# Altium PCB LCD_Board.PcbDoc
Units mil, origin at the board's own origin, x right, y up, seen from the top; angles counter-clockwise.
Board outline 4860 x 2830 mil, 2 copper layers (Top Layer, Bottom Layer); 37 components, 28 nets, 226 pads, 30 vias.
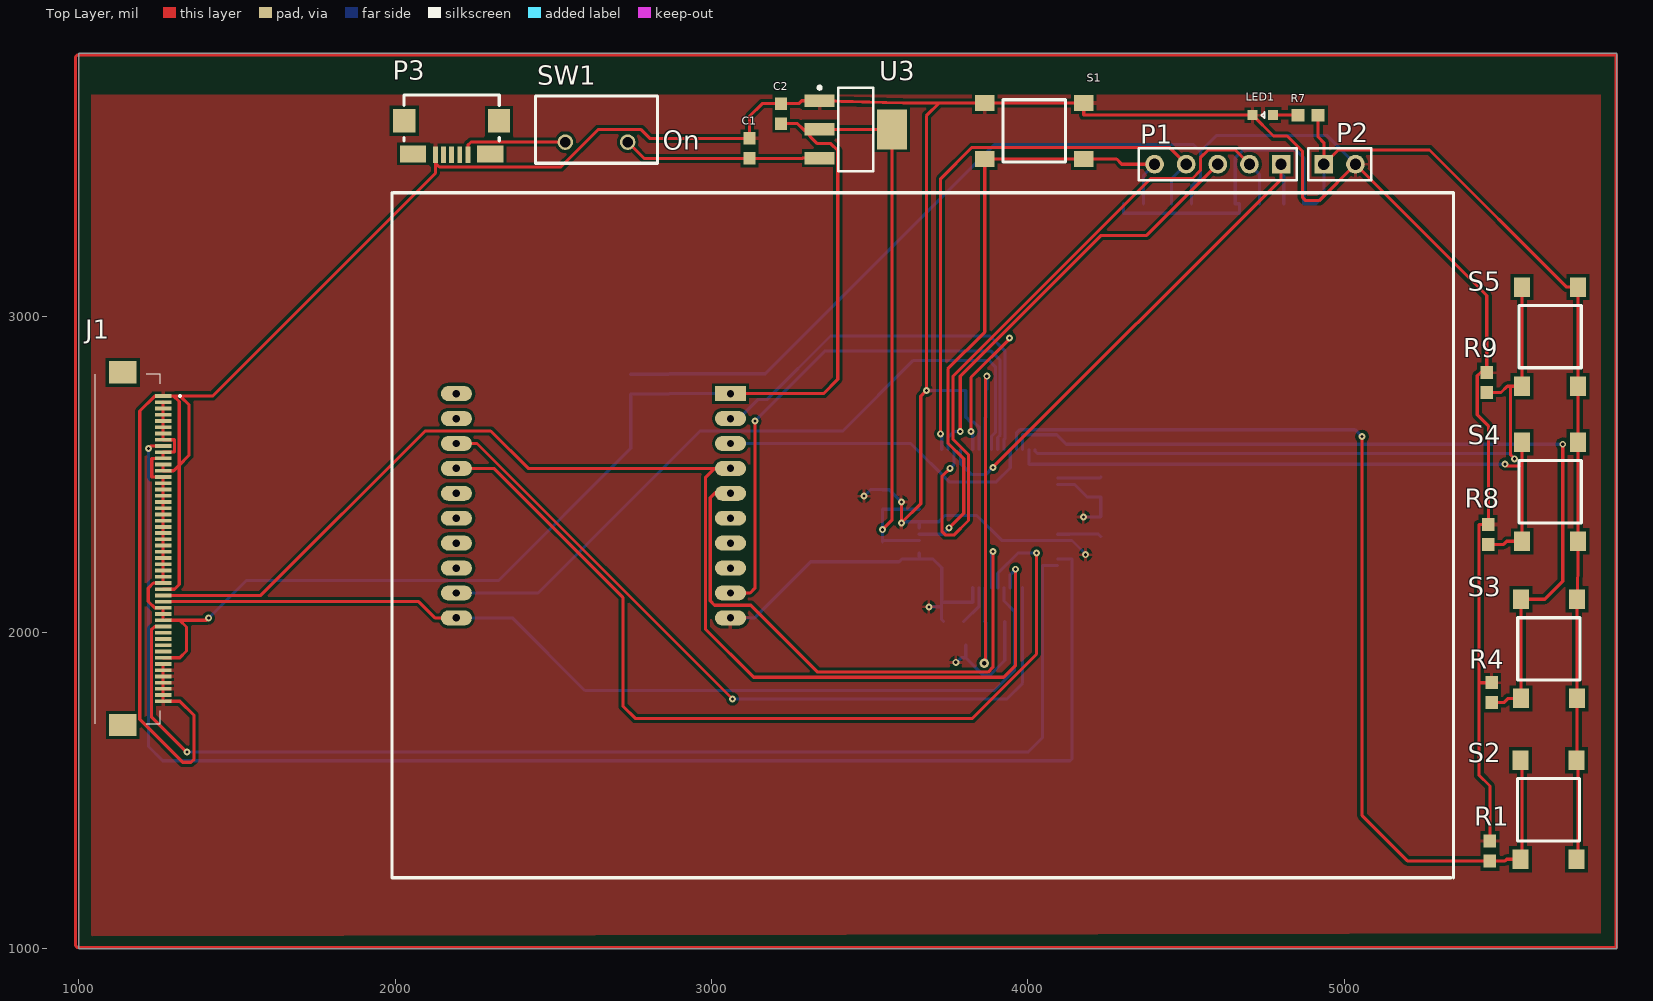
[diagram p0: Top Layer view]
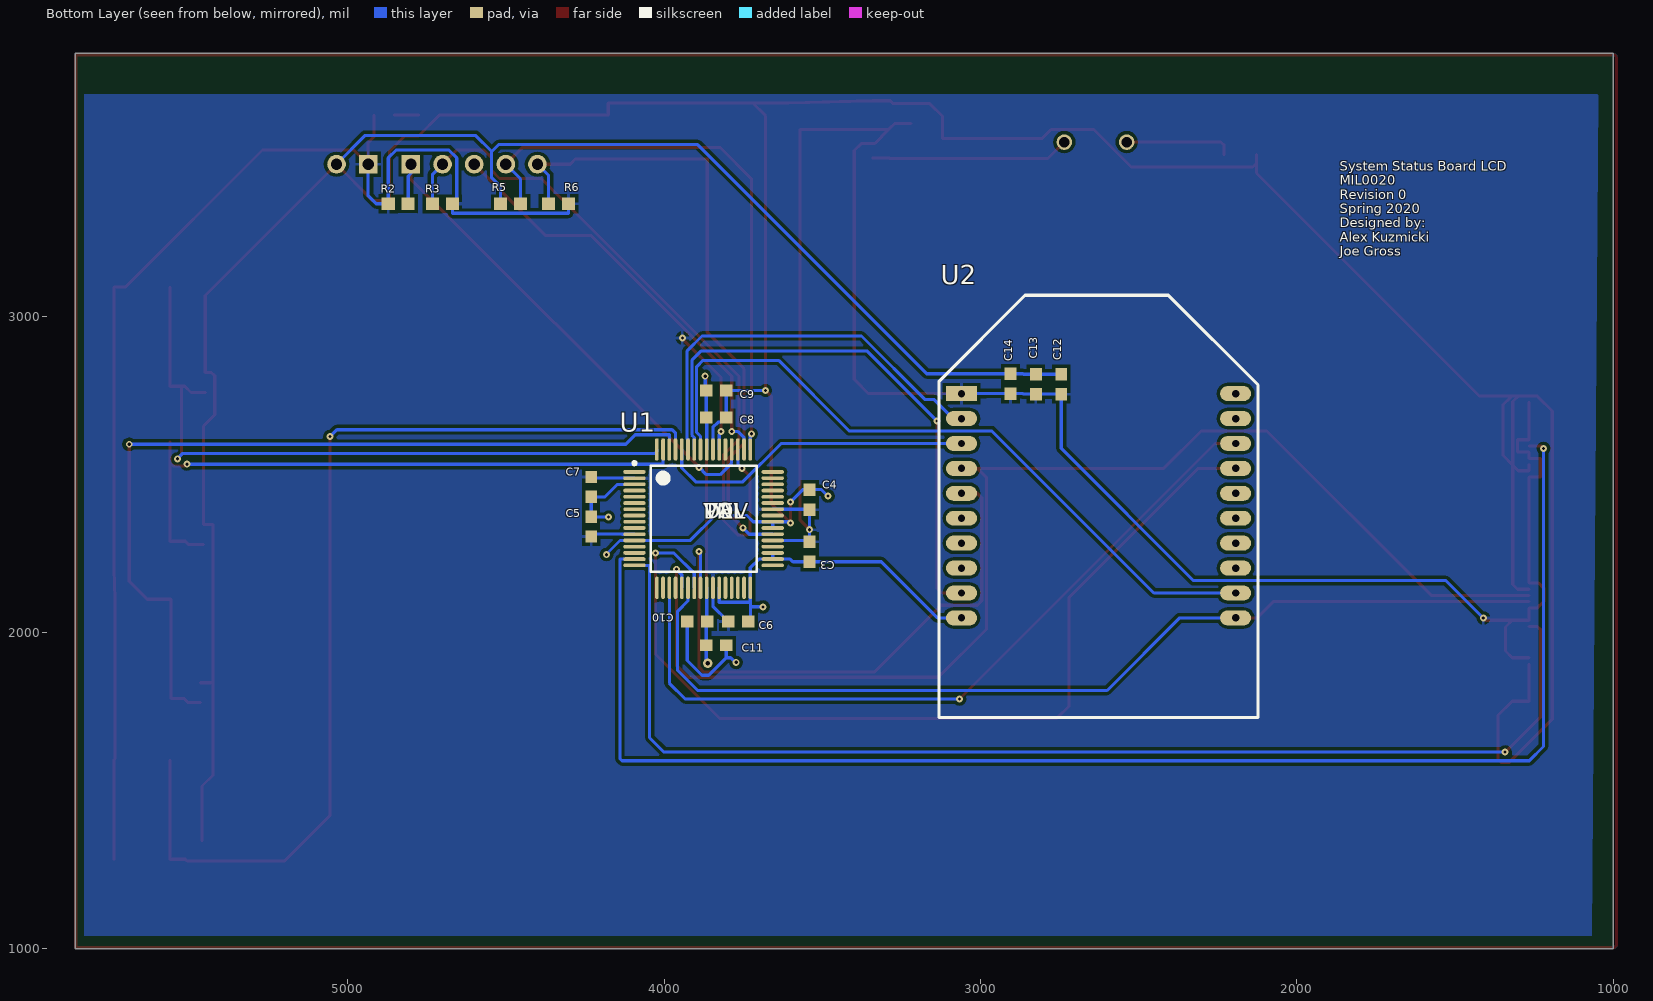
[diagram p1: Bottom Layer view, seen from below]

## Layer stack, top to bottom
Top Solder: solder mask 0.4, Solder Resist, Dk 3.5
Top Layer: signal copper 1.4
Dielectric 1: dielectric 12.6, FR-4, Dk 4.8
Bottom Layer: signal copper 1.4
Bottom Solder: solder mask 0.4, Solder Resist, Dk 3.5

## Board outline
1000,1000 5860,1000 5860,3830 1000,3830

## Design rules (kind name [scope] priority, off if disabled: settings)
Clearance [All] p1: gap=10 ignorepadtopadclearanceinfootprint=FALSE except(0: Arc-Hole Track-Hole SMDPad-Hole THPad-Hole Via-Hole Fill-Hole Poly-Hole Region-Hole Text-Hole; 5: Track-Track Track-SMDPad SMDPad-SMDPad; 7: Track-Via)
HoleSize [All] p1: absolutevalues=TRUE maxlimit=150 minlimit=10 maxpercent=80.000 minpercent=20.000
MinimumAnnularRing [All] p1: minimumring=7
MinimumSolderMaskSliver [All] p1: minsoldermaskwidth=1
PolygonConnect [All] p1: connectstyle=Relief reliefconductorwidth=10 reliefentries=4 polygonreliefangle="90 Angle" airgapwidth=10
RoutingVias [All] p1: holewidth=10 width=22 viastyle="Through Hole" minholewidth=10 minwidth=22 maxholewidth=100 maxwidth=150
SilkToSolderMaskClearance [IsPad] p1: minsilkscreentomaskgap=5 clearancetoexposedcopper=TRUE
SolderMaskExpansion [All] p1: expansion=4
Width [All] p1: maxlimit=150 minlimit=8 preferedwidth=10
27 further rules are at their usual default settings.

## Components (designator, comment, footprint, x,y, rotation, side; value= is the part's Value field where it differs from the comment)
C1 "Cap" CAPC0603 3120,3530 r90 top value=1uF
C2 "Cap" CAPC0603 3220,3640 r90 top value=1uF
C3 "Cap" CAPC0603 3540,2255 r270 bottom value=0.1uF
C4 "Cap" CAPC0603 3540,2420 r90 bottom value=0.1uF
C5 "Cap" CAPC0603 4230,2335 r90 bottom value=0.1uF
C6 "Cap" CAPC0603 3765,2035 r180 bottom value=0.1uF
C7 "Cap" CAPC0603 4230,2460 r270 bottom value=2.1uF
C8 "Cap" CAPC0603 3835,2680 r180 bottom value=0.1uF
C9 "Cap" CAPC0603 3835,2765 r180 bottom value=0.1uF
C10 "Cap" CAPC0603 3895,2035 r0 bottom value=1.0uF
C11 "Cap" CAPC0603 3835,1960 r180 bottom value=2.2uF
C12 "Cap" CAPC0603 2745,2785 r90 bottom value=10uF
C13 "Cap" CAPC0603 2825,2785 r90 bottom value=1uF
C14 "Cap" CAPC0603 2905,2786.5 r90 bottom value=47pF
J1 "XF3M-5015-1B" XF3M50151B 1155,2265 r270 top
LED1 "LED" LED0603 4742.48,3635 r180 top
P1 "Header 5" HDR1X5 4800,3480 r180 top
P2 "Header 2" HDR1X2 4935,3480 r0 top
P3 "USB Micro" 10118192-0001LF 2178.82,3489 r180 top
R1 "Res" RES0603 5460,1310 r270 top value=10k
R2 "Res" RES0603 4840,3355 r180 bottom value=10k
R3 "Res" RES0603 4700,3355 r0 bottom value=10k
R4 "Res" RES0603 5465,1810 r270 top value=10k
R5 "Res" RES0603 4485,3355 r0 bottom value=10k
R6 "Res" RES0603 4333.5,3355 r0 bottom value=10k
R7 "Res" RES0603 4885,3635 r180 top value=10k
R8 "Res" RES0603 5455,2310 r270 top value=10k
R9 "Res" RES0603 5450,2790 r270 top value=10k
S1 "Button" PTS645xxxxSMTR92 4020,3585 r180 top
S2 "Button" PTS645xxxxSMTR92 5645,1440 r90 top
S3 "Button" PTS645xxxxSMTR92 5646.42,1948.5 r90 top
S4 "Button" PTS645xxxxSMTR92 5650,2445 r90 top
S5 "Button" PTS645xxxxSMTR92 5650,2935 r90 top
SW1 "360-2610-ND" AS11CP 50392.48,52455.51 r0 top
U1 "TM4C123GH6PMT7R" PM0064A_N 3875,2360 r180 bottom value=Value
U2 "XBee" XBee 3060,2754.92 r180 bottom
U3 "TLV1117LV33DCYR" SOT23-4N 3455.83,3590 r0 top

## Footprints (in the part's own frame and the unit in brackets; to place one, negate y for a bottom-side part, rotate by r counter-clockwise, add the part's x,y. Pads: shape width x height; smd on the part's side, far side on the other; paste and mask are expansions set on the pad)
10118192-0001LF [mm] "USB Micro-B Recepticle"
  rect 0.4x1.35 smd: 1(-1.3,-0.533) 2(-0.65,-0.533) 3(0,-0.533) 4(0.65,-0.533) 5(1.3,-0.533)
  rect 1.8x1.9 smd: SHD(-3.8,-3.248) SHD(3.8,-3.248)
  rect 2.1x1.35 smd: SHD(-3.1,-0.584) SHD(3.1,-0.598)
  silkscreen extent -3.83,-5.33 3.83,-1.63, body extent -3.96,-5.98 3.96,-0.32, height 3.09
AS11CP [mm] "SPST Slide Switch"
  round 1.25 hole 0.85: In(-1215.5,-1242.2) Out(-1210.5,-1242.2)
  silkscreen extent -1217.9,-1243.9 -1208.1,-1238.5, body extent -1218,-1243.8 -1208.2,-1238.42, height 12.9
CAPC0603 [mm] "Chip Capacitor, 2-Leads, Body 1.60x0.80mm, IPC Medium Density"
  rect 1x0.95 smd: 1(-0.8,0) 2(0.8,0)
  body extent -0.88,-0.48 0.87,0.48, height 0.8
HDR1X2 [mm] "Connector; Header; 2 Position"
  rect 1.5x1.5 hole 0.9: 1(0,0)
  round 1.5 hole 0.9: 2(2.54,0)
  silkscreen extent -1.27,-1.27 3.81,1.27
HDR1X5 [mm] "Connector; Header; 5 Position"
  rect 1.5x1.5 hole 0.9: 1(0,0)
  round 1.5 hole 0.9: 2(2.54,0) 3(5.08,0) 4(7.62,0) 5(10.16,0)
  silkscreen extent -1.27,-1.27 11.43,1.27
LED0603 [mm] "Chip LED, 2-Leads, Body 1.60x0.80mm, IPC Medium Density"
  rect 0.8x0.8 smd: A(-0.825,0) C(0.825,0)
  silkscreen extent -0.13,-0.25 0.12,0.25, body extent -0.88,-0.48 0.87,0.47, height 0.8
PM0064A_N [mm]
  oval 1.8x0.3 smd paste-0.102 mask+0.051: 1(-5.55,3.75) 2(-5.55,3.25) 3(-5.55,2.75) 4(-5.55,2.25) 5(-5.55,1.75) 6(-5.55,1.25) 7(-5.55,0.75) 8(-5.55,0.25) 9(-5.55,-0.25) 10(-5.55,-0.75) 11(-5.55,-1.25) 12(-5.55,-1.75) 13(-5.55,-2.25) 14(-5.55,-2.75) 15(-5.55,-3.25) 16(-5.55,-3.75) 33(5.55,-3.75) 34(5.55,-3.25) 35(5.55,-2.75) 36(5.55,-2.25) 37(5.55,-1.75) 38(5.55,-1.25) 39(5.55,-0.75) 40(5.55,-0.25) 41(5.55,0.25) 42(5.55,0.75) 43(5.55,1.25) 44(5.55,1.75) 45(5.55,2.25) 46(5.55,2.75) 47(5.55,3.25) 48(5.55,3.75)
  oval 0.3x1.8 smd paste-0.102 mask+0.051: 17(-3.75,-5.55) 18(-3.25,-5.55) 19(-2.75,-5.55) 20(-2.25,-5.55) 21(-1.75,-5.55) 22(-1.25,-5.55) 23(-0.75,-5.55) 24(-0.25,-5.55) 25(0.25,-5.55) 26(0.75,-5.55) 27(1.25,-5.55) 28(1.75,-5.55) 29(2.25,-5.55) 30(2.75,-5.55) 31(3.25,-5.55) 32(3.75,-5.55) 49(3.75,5.55) 50(3.25,5.55) 51(2.75,5.55) 52(2.25,5.55) 53(1.75,5.55) 54(1.25,5.55) 55(0.75,5.55) 56(0.25,5.55) 57(-0.25,5.55) 58(-0.75,5.55) 59(-1.25,5.55) 60(-1.75,5.55) 61(-2.25,5.55) 62(-2.75,5.55) 63(-3.25,5.55) 64(-3.75,5.55)
  silkscreen extent -5.68,-4.25 4.25,4.57, body extent -4.19,-4.19 4.19,4.19, height 0.64
PTS645xxxxSMTR92 [mm] "PTS645 Series SMT 6 mm Tactile Switch"
  rect 1.555x1.3 smd: A(-3.975,2.25) A(3.975,2.25) B(-3.975,-2.25) B(3.975,-2.25)
  silkscreen extent -2.5,-2.5 2.5,2.5, body extent -3,-3 3,3, height 4.5
RES0603 [mm] "Chip Resistor, 2-Leads, Body 1.60x0.80mm, IPC Medium Density"
  rect 1.05x1 smd: 1(-0.8,0) 2(0.8,0)
  body extent -0.88,-0.48 0.87,0.47, height 0.8
SOT23-4N [mm] "SOT223, 4-Leads, Body 6.50x7.00mm (avg), Pitch 2.30mm, IPC Medium Density"
  rect 2.4x1 smd: 1(-2.9,2.3) 2(-2.9,0) 3(-2.9,-2.3)
  rect 2.4x3.2 smd: 4(2.9,0)
  silkscreen extent -3.02,-3.35 1.4,3.47, body extent -1.85,-3.35 1.85,3.35, height 1.7
XBee [mm]
  rect 2.5x1.2 hole 0.6: 1(0,0)
  oval 2.5x1.2 hole 0.6: 2(0,-2) 3(0,-4) 4(0,-6) 5(0,-8) 6(0,-10) 7(0,-12) 8(0,-14) 9(0,-16) 10(0,-18) 11(22,-18) 12(22,-16) 13(22,-14) 14(22,-12) 15(22,-10) 16(22,-8) 17(22,-6) 18(22,-4) 19(22,-2) 20(22,0)
  silkscreen extent -1.8,-26 23.8,7.9, body extent -1.9,-26 23.8,8, height 4.06
XF3M50151B [mm]
  rect 0.3x1.3 smd: 1(-12.25,2.85) 2(-11.75,2.85) 3(-11.25,2.85) 4(-10.75,2.85) 5(-10.25,2.85) 6(-9.75,2.85) 7(-9.25,2.85) 8(-8.75,2.85) 9(-8.25,2.85) 10(-7.75,2.85) 11(-7.25,2.85) 12(-6.75,2.85) 13(-6.25,2.85) 14(-5.75,2.85) 15(-5.25,2.85) 16(-4.75,2.85) 17(-4.25,2.85) 18(-3.75,2.85) 19(-3.25,2.85) 20(-2.75,2.85) 21(-2.25,2.85) 22(-1.75,2.85) 23(-1.25,2.85) 24(-0.75,2.85) 25(-0.25,2.85) 26(0.25,2.85) 27(0.75,2.85) 28(1.25,2.85) 29(1.75,2.85) 30(2.25,2.85) 31(2.75,2.85) 32(3.25,2.85) 33(3.75,2.85) 34(4.25,2.85) 35(4.75,2.85) 36(5.25,2.85) 37(5.75,2.85) 38(6.25,2.85) 39(6.75,2.85) 40(7.25,2.85) 41(7.75,2.85) 42(8.25,2.85) 43(8.75,2.85) 44(9.25,2.85) 45(9.75,2.85) 46(10.25,2.85) 47(10.75,2.85) 48(11.25,2.85) 49(11.75,2.85) 50(12.25,2.85)
  rect 1.8x2.2 smd: MP1(-14.15,-0.4) MP2(14.15,-0.4)
  silkscreen extent -14.05,-2.6 14.05,4.25, body extent -14.87,-2.6 14.87,3.47, height 3.23

## Part data
C1 C2: Manufacturer Part Number=C0603C105K8PACTU, Supplier Part Number 1=399-3118-1-ND, Supplier 1=Digi-Key
C3 C4 C5 C6 C7 C8 C9 C10 C11 C12 C13 C14: Supplier Part Number 1=1276-1000-1-ND, Supplier 1=Digi-Key
J1: "Connector", Manufacturer_Name="Omron Electronics", Mouser2 Part Number=653-XF3M-5015-1B, Datasheet Link=https://componentsearchengine.com/Datasheets/1/XF3M-5015-1B.pdf, Height=3.13mm, Manufacturer_Part_Number=XF3M-5015-1B, Mouser2 Price/Stock=https://www.mouser.com/Search/Refine.aspx?Keyword=653-XF3M-5015-1B
LED1: Color=Red, Supplier Part Number 1=754-1122-1-ND, Supplier 1=Digi-Key
P1: "Header, 5-Pin", LatestRevisionDate=17-Jul-2002, LatestRevisionNote="Re-released for DXP Platform.", Publisher="Altium Limited"
P2: "Header, 2-Pin", LatestRevisionDate=17-Jul-2002, LatestRevisionNote="Re-released for DXP Platform.", Publisher="Altium Limited"
P3: "USB Mini B Metal Shield SMT", Supplier Part Number 1=609-4613-1-ND, Supplier 1=Digi-Key
R1 R2 R3 R4 R5 R6 R7 R8 R9: Supplier Part Number 1=RMCF0603JT10K0CT-ND, Supplier 1=Digi-Key
S1 S2 S3 S4 S5: "SPST Button", Supplier Part Number 1=CKN9087CT-ND, Supplier 1=Digi-Key
SW1: library part "SPST Slide Switch", "SPST Slide Switch", Supplier 1=Digi-Key, Supplier Part Number 1=360-2610-ND
U1: "Imported", Alternate_PartNumber=TM4C123GH6PMT, Manufacturer="Texas Instruments", PartNumber=TM4C123GH6PMTR, CompType=IC, MountType=SMT, PackageReference=PM0064A, PIN_COUNT=64, RefDes=RefDes, RoHS=Y, TYPE=TYPE
U2: "XBee radio", Supplier Part Number 1=602-1181-ND, Supplier 1=Digi-Key
U3: "IC REG LINEAR 3.3V 1A SOT223-4", Digi-Key Part Number=296-28778-1-ND

## Via types
v1: diameter 22, hole 10, Top Layer to Bottom Layer, 29 vias
v2: diameter 30, hole 15, Top Layer to Bottom Layer, tented both sides, 1 vias

## Nets (pads, with @x,y where several pads share a name; then routed paths per layer and width w, separated by ;. In a path a pad name is that pad's centre, name@x,y a point inside that pad or via, vN(x,y) a via of type N, cw(c..) or ccw(c..) an arc to the next point about the centre after c; other vN are vias at no path point)
Button_0: R1.2 S2.A U1.61 | length 3234.8
  Top Layer w10: v1(5056,2619) 5056,1421.5 5199,1278.5 R1.2 5508,1278.5 5513,1283.5 5561.42,1283.5 S2.A@5561.42,1596.5
  Bottom Layer w10: U1.61 3963.58,2630 3974.58,2641 5034,2641 v1(5056,2619)
Button_1: R4.2 S3.A U1.62 | length 2765.9
  Top Layer w10: R4.2 5504,1778.5 5517.5,1792.01 5557.83,1792.01 5557.83,2105 5633,2105 5690,2162 v1(5690,2595)
  Bottom Layer w10: U1.62 3983.27,2625 4091,2625 4121,2595 v1(5690,2595)
Button_2: R8.2 S4.A U1.63 | length 2035.7
  Top Layer w10: R8.2 5503,2278.5 5513,2288.5 5561.42,2288.5 5561.42,2537.42 ; v1(5508,2532) 5514,2526 5550,2526 5561.42,2537.42 ; S4.A@5561.42,2601.5 5561.42,2537.42
  Bottom Layer w10: U1.63 4002.95,2532 v1(5508,2532)
Button_3: R9.2 S5.A U1.64 | length 2199
  Top Layer w10: R9.2 5495,2758.5 5515,2778.5 5525,2778.5 ; v1(5538,2549) 5525,2562 5525,2778.5 ; S5.A@5561.42,3091.5 5561.42,2778.5 5525,2778.5
  Bottom Layer w10: U1.64 4022.64,2572 4028.64,2566 5521,2566 v1(5538,2549)
Button_4: U1.43
Button_5: U1.44
CTS(L): U1.57 U2.12 | length 2282.4
  Bottom Layer w10: U2.12 2452,2125 2964,2637 3415,2637 3638,2860 3877,2860 3897,2840 3897,2632 3884.84,2619.84 U1.57
GND: C1.2 C2.2 C3.2 C4.2 C5.2 C6.2 C7.2 C8.2 C9.2 C10.2 C11.2 C12.2 C13.2 C14.2 J1.1 J1.12 J1.13 J1.32 J1.44 J1.45 J1.46 J1.47 J1.48 J1.49 J1.50 LED1.C P2.2 P3.5 R1.1 R4.1 R5.2 R8.1 R9.1 S1.B U1.3 U1.12 U1.27 U1.32 U1.34 U1.35 U1.39 U1.40 U1.55 U2.10 U3.1 | length 16835.5
  Top Layer w10: J1.44 J1.45 J1.46 J1.47 J1.48 J1.49 J1.50 1320,1782.72 1365,1737.72 1365,1600 1355,1590 1329,1590 1193,1726 1193,2700.28 1240,2747.28 J1.1 1300.51,2747.28 ; J1.32 1303,2137.05 1317.8,2151.84 1317.8,2528.8 ; J1.12 J1.13 1300.06,2511.06 1317.8,2528.8 ; P3.5 2127.64,3483.36 ; v1(3600,2413) v1(3600,2346) 3661,2407 3661,2747 v1(3679,2765) 3679,3632.58 3720,3673.58 ; R1.1 5460,1515 5425,1550 5425,1841.5 ; R4.1 5425,1841.5 ; 1300.51,2747.28 1321.72,2747.28 ; 1300.51,2747.28 1317.8,2730 1317.8,2528.8 ; 1317.8,2528.8 1349,2560 1349,2720 1321.72,2747.28 ; 1321.72,2747.28 1422.92,2747.28 2127.64,3452 2127.64,3483.36 ; 2127.64,3483.36 2140,3471 2524,3471 2643,3590 2776,3590 2804.5,3561.5 C1.2 3120,3631.5 3160,3671.5 C2.2 3276,3671.5 3285.06,3680.55 U3.1 3605.97,3673.58 3720,3673.58 ; 3720,3673.58 3863.5,3673.58 4176.5,3673.58 4176.5,3635 LED1.C 4776,3569 4819,3569 4868,3520 4868,3374.46 4877.46,3365 4920,3365 P2.2 5450,3065 R9.1 5430,2821.5 5420,2811.5 5420,2688 5455,2653 R8.1 5425,2341.5 5425,1841.5
  Bottom Layer w10: C12.2 C13.2 2864,2816.5 2865.5,2817.99 C14.2 3169.99,2817.99 3894,3542 4523,3542 4545,3520 ; U2.10 3136.26,2046.26 3313.5,2223.5 C3.2 3593,2223.5 3601.54,2232.05 U1.34 ; v1(3482,2431) 3503,2452 3540,2452 C4.2 3561.5,2451.5 v1(3600,2413) ; v1(3600,2346) 3604.16,2350.16 U1.40 ; U1.35 U1.34 ; U1.39 U1.40 ; v1(3679,2765) C9.2 C8.2 3804.49,2680 3819.49,2665 3828.97,2665 3845.47,2648.5 U1.55 ; v1(3687,2081) 3687.64,2081.64 3726.64,2081.64 ; C6.2 3726.64,2041.87 3726.64,2081.64 ; v1(3772,1906) 3775.25,1906 3789.74,1920.5 3803.5,1920.5 ; C11.2 3803.5,1920.5 ; U1.27 3825.79,2096 3727.36,2096 ; C10.2 3926.5,1911.5 3880,1865 3859,1865 3803.5,1920.5 ; U1.3 4147,2468.27 4186.76,2428.5 C7.2 C5.2 4228.5,2365 v1(4175,2365) ; v1@4185,2245 4139.24,2290.76 4093.85,2290.76 U1.12 3917.36,2291.1 3838.46,2370 3737.84,2370 3718,2350.16 U1.40 ; R5.2 4516.5,3408.5 4545,3437 4545,3520 ; P2.2 4944,3571 4596,3571 4545,3520 ; U1.34 3700,2232.05 3727.36,2204.69 U1.32 3727.36,2096 ; 3726.64,2081.64 3726.64,2095.28 3727.36,2096
  other v1: 4182,2246
"LCD CS": J1.38 U1.16 | length 3789.6
  Top Layer w10: J1.38 1240,2018.94 1230,2008.94 1230,1734 v1(1342,1622)
  Bottom Layer w10: v1(1342,1622) 4000,1622 4046,1668 4046,2212.36 U1.16
"LCD Reset": J1.9 U1.15 | length 4607.1
  Top Layer w10: v1(1221,2582) 1228.8,2589.8 J1.9
  Bottom Layer w10: v1(1221,2582) 1221,1640 1266,1595 4133,1595 4139,1601 4139,2232.05 U1.15
NetLED1_A: LED1.A R7.2 | length 78.5
  Top Layer w10: LED1.A R7.2
NetP3_1: P3.1 SW1.In | length 342.3
  Top Layer w10: P3.1 2230,3540 2240,3550 SW1.In
RST_N: P1.5 R6.2 S1.A U1.38 | length 2039
  Top Layer w10: v1(3750.95,2331) 3797,2377.05 3797,2549.21 3747.05,2599.16 3747.05,2833.05 3863.5,2949.5 3863.5,3496.42 4176.5,3496.42 4280,3496.42 4296.42,3480 P1.5
  Bottom Layer w10: U1.38 3730.74,2310.79 v1(3750.95,2331) ; R6.2 4365,3445 P1.5
Sleep: U1.58 U2.9 | length 1775.2
  Top Layer w10: U2.9 3122,2125 3137,2140 v1(3137,2667.98)
  Bottom Layer w10: v1(3137,2667.98) 3359.02,2890 3882,2890 3912,2860 3912,2624 3904.53,2616.53 U1.58
"SPI CLK": U1.19 U2.18 | length 2445.9
  Top Layer w10: U2.18 2259,2597.44 v1(3066.44,1790)
  Bottom Layer w10: v1(3066.44,1790) 3933,1790 3983.27,1840.27 U1.19
"SPI MISO": J1.33 U1.21 U2.4 | length 4004.5
  Top Layer w10: J1.33 1575.36,2117.36 2095,2637 2302,2637 2420.3,2518.7 3010,2518.7 ; U2.4 3010,2518.7 ; v1(3961,2200) 3961,1896.88 3922.9,1858.78 3133.22,1858.78 2980.79,2011.21 2980.79,2489.49 3010,2518.7
  Bottom Layer w10: U1.21 3943.9,2182.9 v1(3961,2200)
"SPI MOSI": J1.34 U1.22 U2.11 | length 3107.2
  Top Layer w10: J1.34 2074.58,2097.68 2126,2046.26 U2.11
  Bottom Layer w10: U2.11 2370.74,2046.26 2600,1817 3894,1817 3957,1880 3957,2067.21 3924.21,2100 U1.22
"SPI SS": U1.23 U2.17 | length 2959.6
  Top Layer w10: U2.17 2312.3,2518.7 2720,2111 2720,1768 2760,1728 3823,1728 4027,1932 v1(4027,2251)
  Bottom Layer w10: U1.23 3904.53,2187 3968.53,2251 v1(4027,2251)
TCK/SWCLK: P1.1 R2.2 U1.52 | length 1634
  Top Layer w10: v1(3889,2522) 4800,3433 P1.1
  Bottom Layer w10: U1.52 3786.42,2535.58 3822.93,2499.07 3866.07,2499.07 v1(3889,2522) ; P1.1 4800,3450.47 4808.5,3441.97 R2.2
TDI: P1.3 U1.50 | length 1350.9
  Top Layer w10: v1(3786,2635) 3786,2810 4231,3255 4375,3255 P1.3
  Bottom Layer w10: U1.50 3747.05,2616.05 3766,2635 v1(3786,2635)
TDO/SWO: P1.4 R5.1 U1.49 | length 1840.1
  Top Layer w10: v1(3724,2628) 3724,3434 3823,3533 4447,3533 P1.4
  Bottom Layer w10: v1(3724,2628) 3727.36,2624.64 U1.49 ; R5.1 4453.5,3433.5 P1.4
TMS/SWDIO: P1.2 R3.2 U1.51 | length 2272.2
  Top Layer w10: v1(3754,2519) 3727.95,2492.95 3727.95,2320 3739.95,2308 3766,2308 3812,2354 3812,2562 3763,2611 3763,2810 4388,3435 4520,3435 4545,3460 4545,3500 4570,3525 4655,3525 P1.2
  Bottom Layer w10: v1(3754,2519) 3766.73,2531.73 U1.51 ; P1.2 4731.5,3448.5 R3.2
"UART5 RX": U1.59 U2.2 | length 1308.8
  Bottom Layer w10: U2.2 3086,2676.18 3145.82,2736 3175,2736 3376,2937 3880,2937 3927,2890 3927,2612 3924.21,2612 U1.59
"UART5 TX": U1.60 U2.3 | length 1011
  Bottom Layer w10: U2.3 3629.56,2597.44 3751,2476 3900,2476 3943.9,2519.9 U1.60
VDD: C2.1 C3.1 C4.1 C5.1 C6.1 C7.1 C12.1 C13.1 C14.1 J1.2 J1.3 J1.4 J1.5 J1.6 J1.7 J1.8 J1.10 J1.11 J1.14 J1.15 J1.16 J1.17 J1.18 J1.19 J1.20 J1.21 J1.22 J1.23 J1.24 J1.25 J1.26 J1.27 J1.28 J1.29 J1.30 J1.31 J1.35 J1.36 J1.37 J1.43 P2.1 R2.1 R3.1 R6.1 R7.1 S2.B S3.B S4.B S5.B U1.2 U1.11 U1.26 U1.37 U1.42 U1.54 U2.1 U3.2 U3.4 | length 11400.9
  Top Layer w10: J1.43 1320,1920.51 1341,1941.51 1341,2017.62 1320,2038.62 ; J1.2 J1.3 J1.4 J1.5 J1.6 J1.7 J1.8 1302.8,2609.49 1302.8,2570.12 J1.10 J1.11 1231,2550.43 1231,2491.38 J1.14 J1.15 J1.16 J1.17 J1.18 J1.19 J1.20 J1.21 J1.22 J1.23 J1.24 J1.25 J1.26 J1.27 J1.28 J1.29 J1.30 J1.31 1236.24,2156.73 1220,2140.5 1220,2097.99 1240,2077.99 J1.35 J1.36 J1.37 1320,2038.62 ; v1(1411,2046) 1403.62,2038.62 1320,2038.62 ; U2.1 3353.92,2754.92 3399,2800 3399,3523.17 3377.17,3545 3334.5,3545 3289.5,3590 ; C2.1 3271,3608.5 3289.5,3590 ; v1(3540,2325) 3570,2355 U3.4 U3.2 3289.5,3590 ; v1(3820,2635) 3820,2806.21 3943.79,2930 v1@3945,2930 ; R7.1 4916.5,3566.5 4935,3548 P2.1 4980,3525 5269,3525 5702.5,3091.5 5738.58,3091.5 5738.58,2778.5 5738.58,2601.5 5738.58,2288.5 5738.58,2199.58 5735,2105 5735,1792.01 5735,1600.08 5738.58,1596.5 S2.B@5738.58,1283.5
  Bottom Layer w10: v1(1411,2046) 1529,2164 2327,2164 2745,2582 C12.1 C13.1 2864,2753.5 2865.5,2755 C14.1 2982,2755 2982.08,2754.92 U2.1 ; U1.37 3544.61,2291.1 C3.1 v1(3540,2325) C4.1 3541.02,2389.53 U1.42 ; C6.1 3797.48,2035 3845.47,2082.99 U1.26 ; v1(3820,2635) 3820,2631.75 3825.44,2626.31 3825.44,2578.85 U1.54 ; U1.11 4131.98,2310.79 4132.13,2310.95 4222.56,2310.95 C5.1 ; U1.2 4226.46,2487.95 C7.1 ; R6.1 4302,3325 4668.5,3325 R3.1 4655,3355 4655,3500 4680,3525 4846.5,3525 4871.5,3500 R2.1 4910,3355 4935,3380 P2.1
  other v1: 3942,2931
VDDC: C8.1 C9.1 C10.1 C11.1 U1.25 U1.56 | length 1384
  Top Layer w10: v2(3861.98,1903.02) 3865.75,1906.8 3865.75,2805.75 v1(3870,2810)
  Bottom Layer w10: v2(3861.98,1903.02) 3866.5,1907.54 C11.1 3866.5,2032.01 C10.1 ; C10.1@3865.16,2036.34 U1.25 ; U1.56 3865.16,2678.66 C8.1 C9.1 3870,2768.5 v1(3870,2810)
VIN: C1.1 SW1.Out U3.3 | length 628.4
  Top Layer w10: SW1.Out 2786.5,3498.5 C1.1 3287.05,3498.5 3287.99,3499.45 U3.3
"Zigbee Reset": U1.24 U2.5 | length 1871.4
  Top Layer w10: U2.5 3010,2439.96 2995.79,2425.75 2995.79,2100 3009.41,2086.38 3124,2086.38 3335.38,1875 3874,1875 3889,1890 v1(3889,2256.37)
  Bottom Layer w10: U1.24 3884.84,2252.21 v1(3889,2256.37)
pads on no net: J1.39 J1.40 J1.41 J1.42 J1.MP1 J1.MP2 P3.2 P3.3 P3.4 P3.SHD U1.1 U1.4 U1.5 U1.6 U1.7 U1.8 U1.9 U1.10 U1.13 U1.14 U1.17 U1.18 U1.20 U1.28 U1.29 U1.30 U1.31 U1.33 U1.36 U1.41 U1.45 U1.46 U1.47 U1.48 U1.53 U2.6 U2.7 U2.8 U2.13 U2.14 U2.15 U2.16 U2.19 U2.20
copper on no net: | length 15371.4
  Top Layer w10: 990,1010.86 990,3819.14 995.86,3825 5859.14,3825 5859.14,1035.86 5859.14,1005 995.86,1005 990,1010.86

## Polygon pours and split planes (outlines as drawn)
GND on Top Layer "Top Layer-GND" (solid, pour order 16): 1040,1040 1040,3700 5810,3700 5810,1050
no net on Top Layer "Top Layer-No Net 1" (solid, pour order 22): 5860,3780
no net on Top Layer "Top Layer-No Net 2" (solid, pour order 20): 4585,1545
no net on Top Layer "Top Layer-No Net 3" (solid, pour order 18): 4585,1520
no net on Top Layer "Top Layer-No Net" (solid, pour order 2): 6755,1185
VDD on Bottom Layer "Bottom Layer-VDD" (solid, pour order 12): 1067.75,1041.16 5832.75,1041.16 5832.75,3701.16 5812.75,3701.16 5752.75,3701.16 1047.75,3701.16
no net on Bottom Layer "Bottom Layer-No Net 1" (solid, pour order 14): 1020.03,3696.45
no net on Bottom Layer "Bottom Layer-No Net" (solid, pour order 8): 1865,4175

## Silkscreen, mask and mechanical layers (free items; w line width, h text height)
Top Overlay:
  lines w10: 1990,3390.35 1990,1225 5336.46,1225 ; 1995,3390 5341.46,3390 ; 5345,1225 5345,3390.35
Bottom Overlay:
  text "System Status Board LCD / MIL0020 / Revision 0 / Spring 2020 / Designed by:  / Alex Kuzmicki / Joe Gross" at 1865,3190 h30

## Text inside footprints (layer, text, board x,y; h text height)
SW1: Top Overlay "On" at 2845.24,3526.38 h60
U1: Bottom Overlay "DEV" at 3875,2360 h50; Bottom Overlay "PN" at 3875,2360 h50; Bottom Overlay "VAL" at 3875,2360 h50; Bottom Overlay "TOL" at 3875,2360 h50